# Altium PCB Key.PcbDoc
Units mil, origin at the board's own origin, x right, y up, seen from the top; angles counter-clockwise.
Board outline 1960 x 1940 mil, 2 copper layers (Top Layer, Bottom Layer); 44 components, 36 nets, 185 pads, 103 vias.
Unrouted connection lines stored in the file: 29.
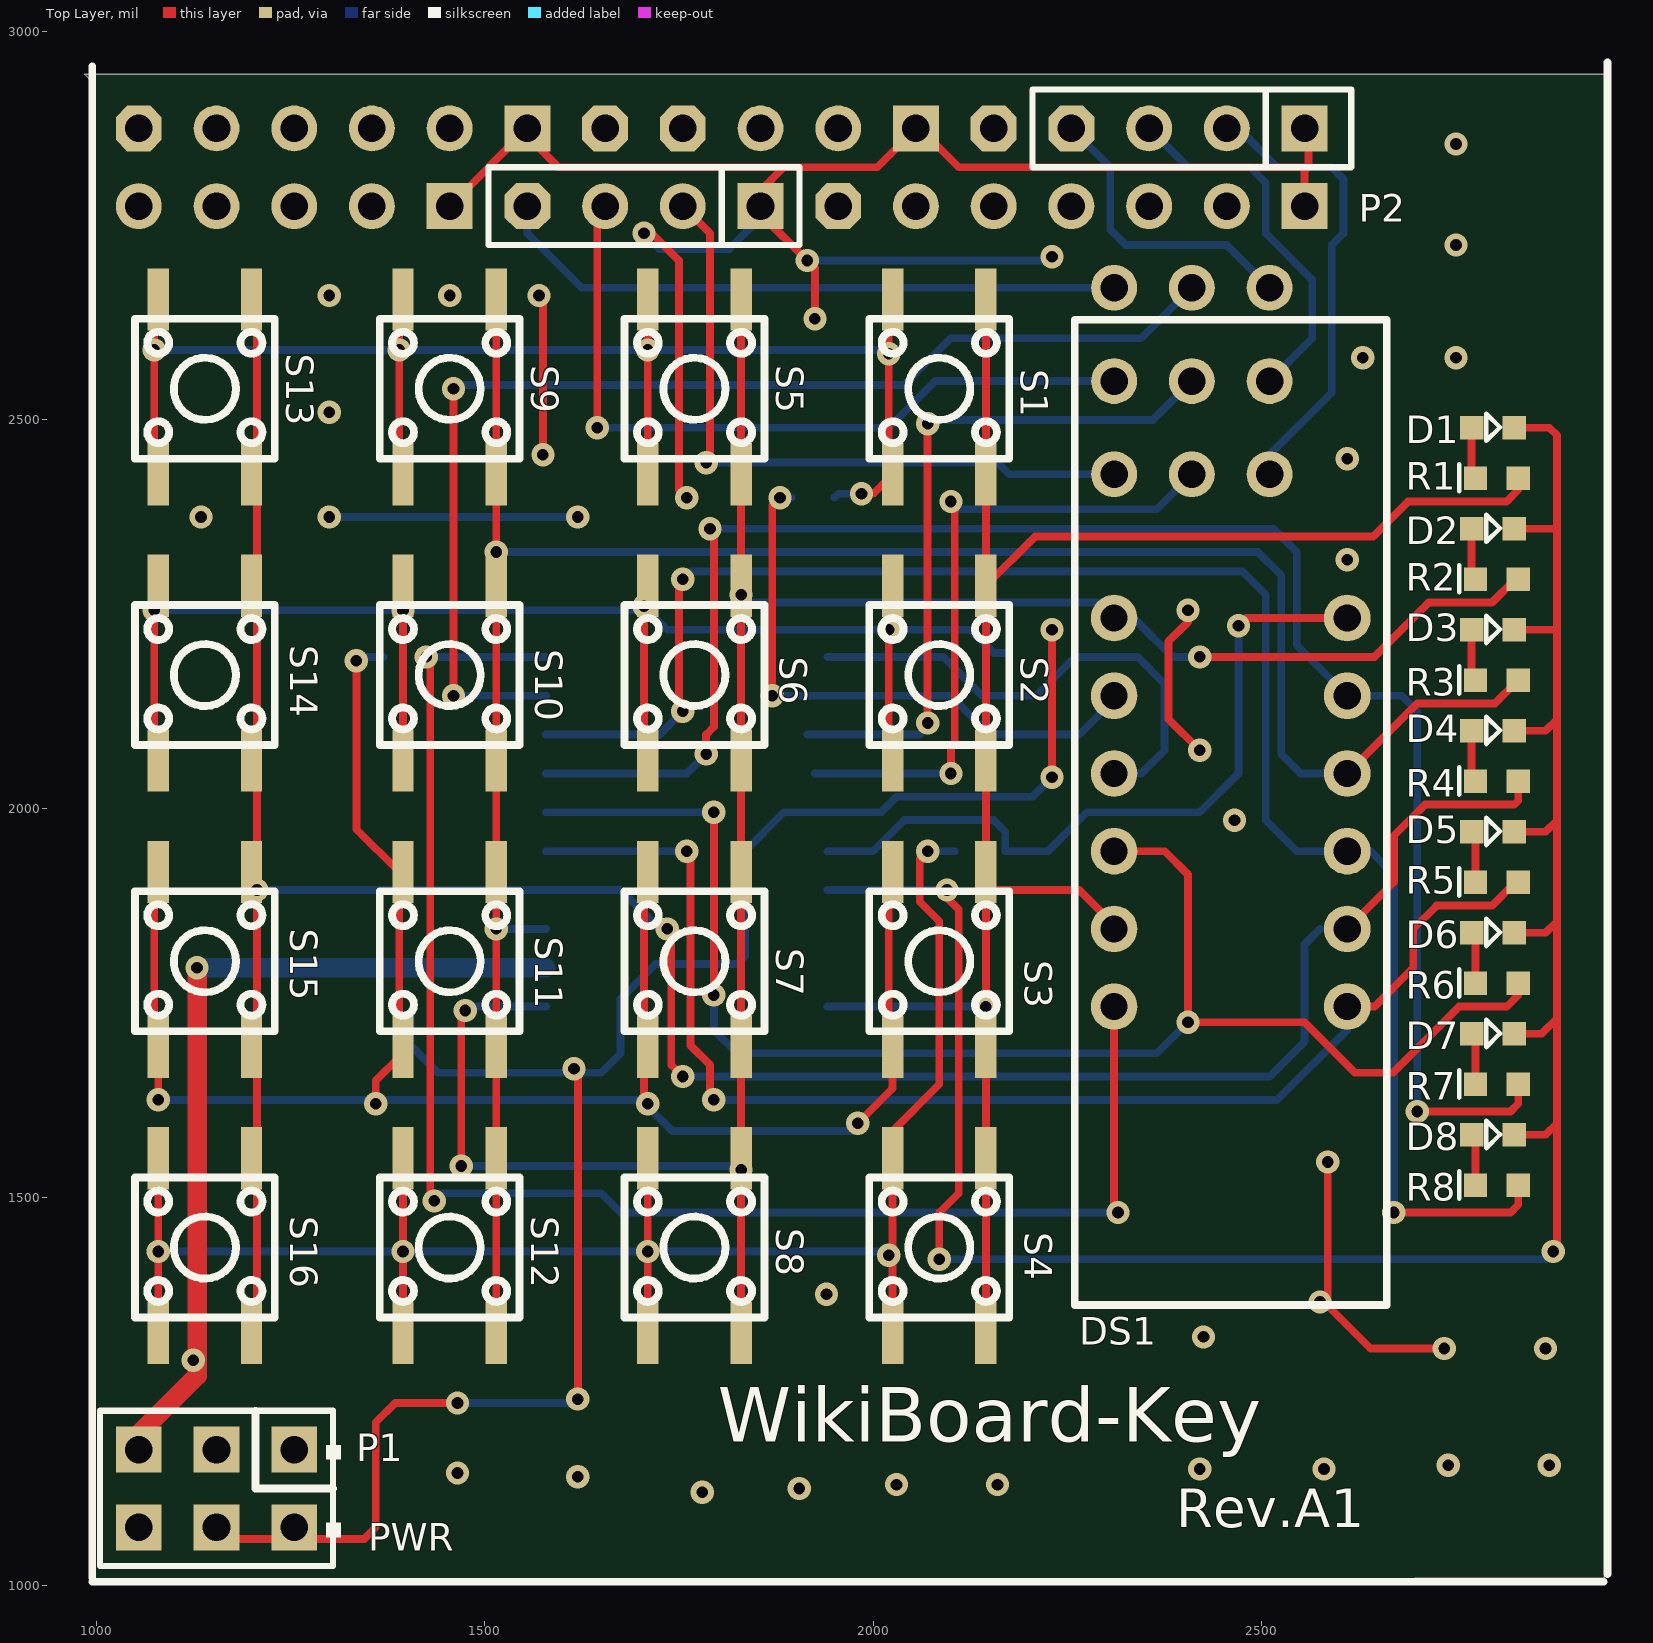
[diagram p0: Top Layer view]
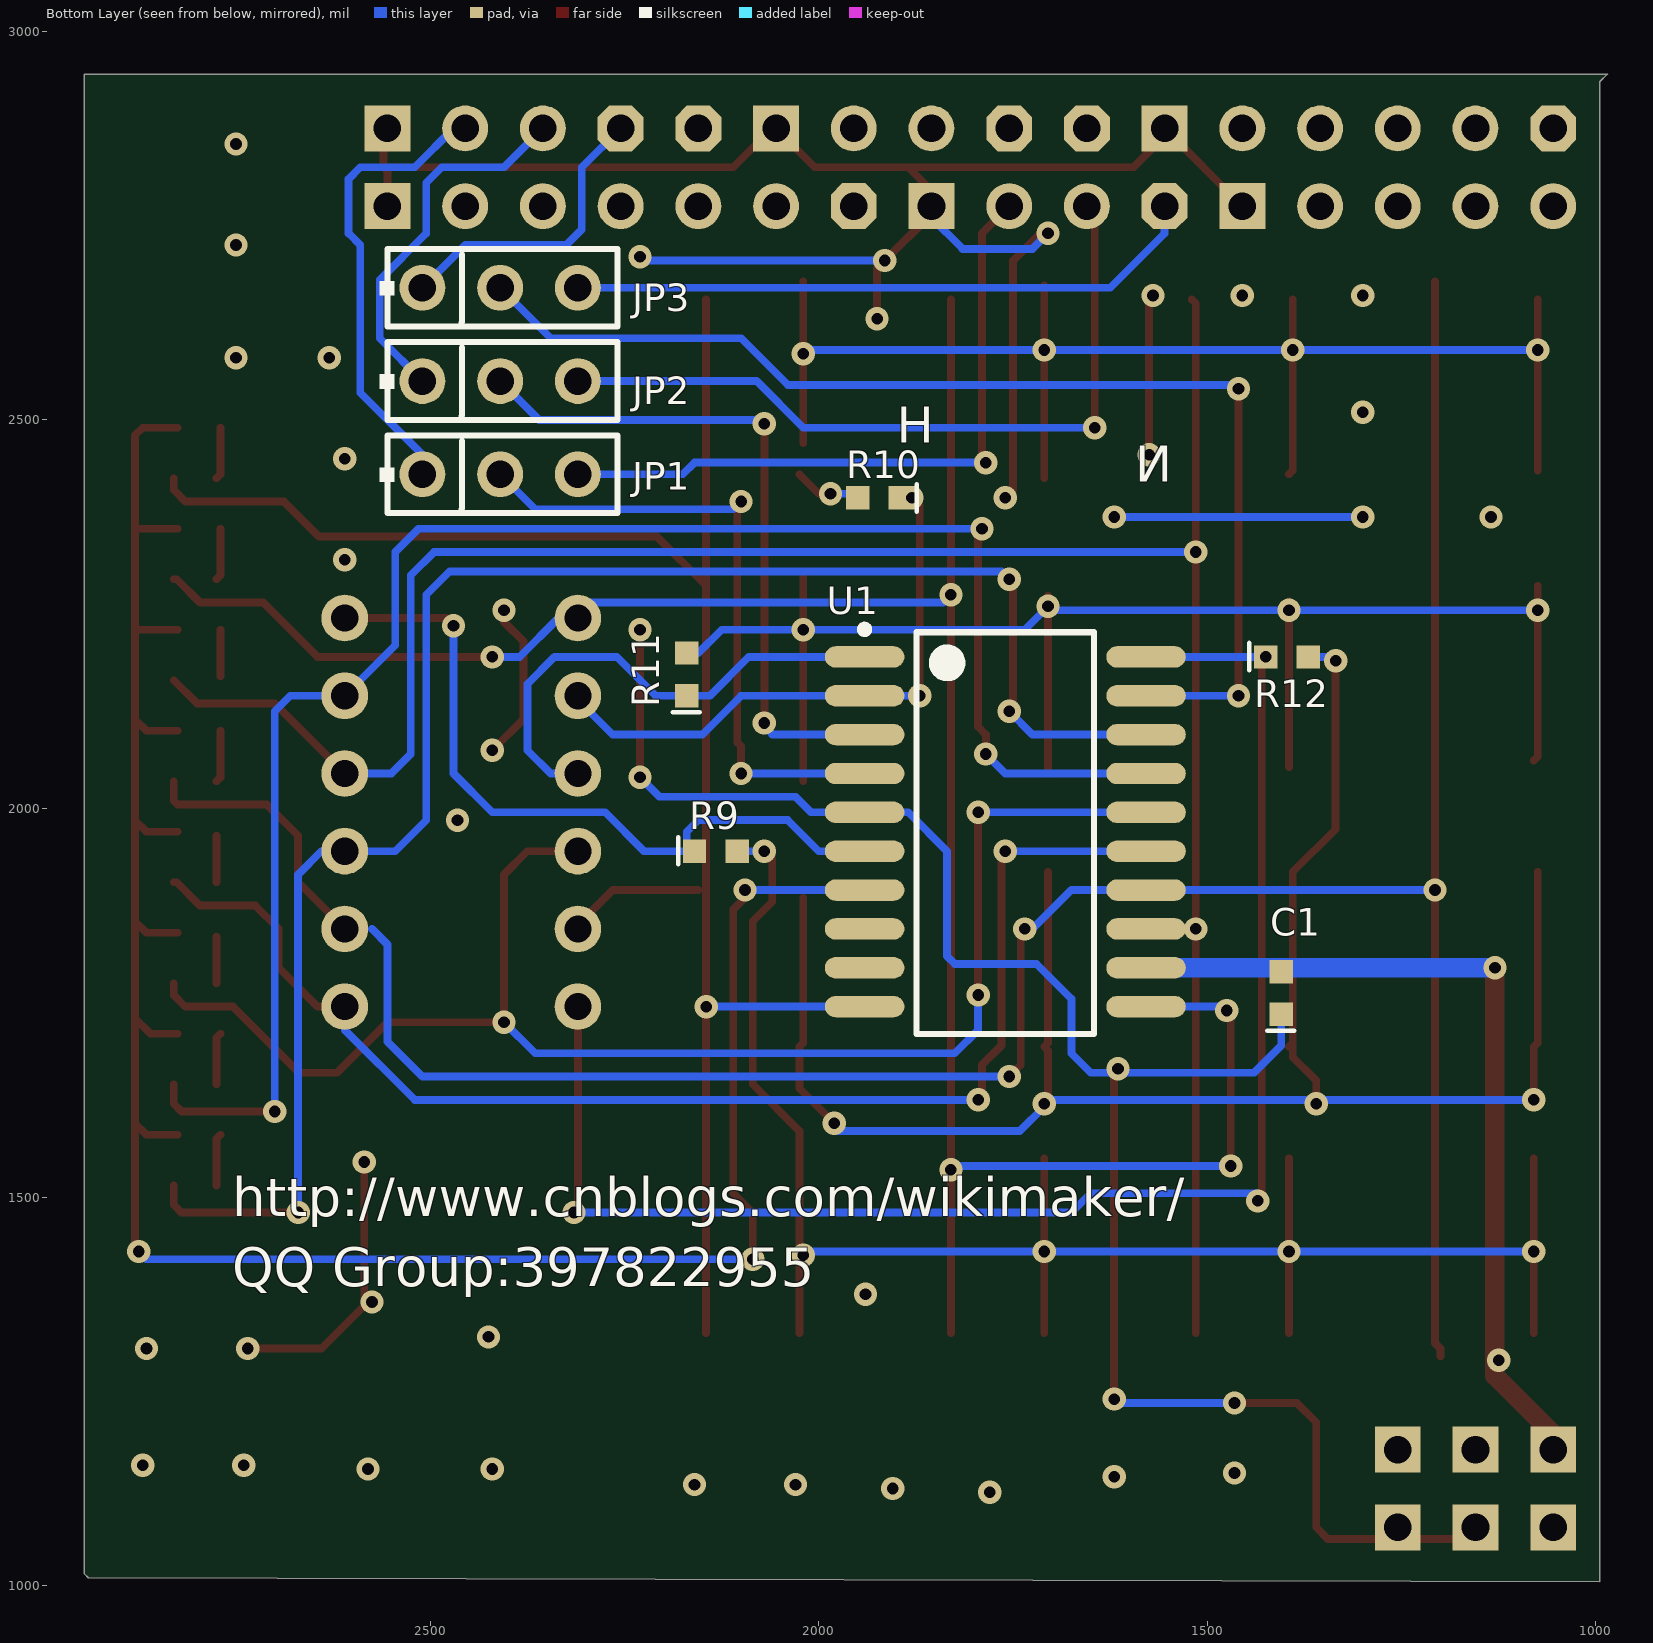
[diagram p1: Bottom Layer view, seen from below]

## Layer stack, top to bottom
Top Solder: solder mask 0.4, Solder Resist, Dk 3.5
Top Layer: signal copper 1.4
Dielectric1: dielectric 12.6, FR-4, Dk 4.8
Bottom Layer: signal copper 1.4
Bottom Solder: solder mask 0.4, Solder Resist, Dk 3.5

## Board outline
2940,1010 2945,1015 2945,2945 985,2945 995,2935 995,1005

## Design rules (kind name [scope] priority, off if disabled: settings)
Clearance [All] p1: gap=10
PolygonConnect [All] p1: connectstyle=Relief reliefconductorwidth=10 reliefentries=4 polygonreliefangle="90 Angle" airgapwidth=10
RoomDefinition Key [InComponentClass('Key')] p1: confinementstyle=ConfineIn formatcopy=TRUE lockcomponents=FALSE outline 995,1000 2945,1000 2945,2945 995,2945
RoutingVias [All] p1: holewidth=15 width=30 viastyle="Through Hole" minholewidth=10 minwidth=20 maxholewidth=28 maxwidth=50
SolderMaskExpansion [All] p1: expansion=4
UnpouredPolygon [All] p1: allowunpoured=FALSE
Width [All] p1: maxlimit=30 minlimit=10 preferedwidth=10
29 further rules are at their usual default settings.

## Components (designator, comment, footprint, x,y, rotation, side; value= is the part's Value field where it differs from the comment)
C1 "0.1uF" 0603M 1405,1735 r90 bottom
D1 "RED" 0603pn 2770,2490 r0 top
D2 "RED" 0603pn 2770,2360 r0 top
D3 "RED" 0603pn 2770,2230 r0 top
D4 "RED" 0603pn 2770,2100 r0 top
D5 "RED" 0603pn 2770,1970 r0 top
D6 "RED" 0603pn 2770,1840 r0 top
D7 "RED" 0603pn 2770,1710 r0 top
D8 "RED" 0603pn 2770,1580 r0 top
DS1 "7SEG-4" 7SGLED-4-0.28 2460,1995 r90 top
JP1 "Jumper3" HDR1X3/2.54MM 2510,2430 r180 bottom
JP2 "Jumper3" HDR1X3/2.54MM 2510,2550 r180 bottom
JP3 "Jumper3" HDR1X3/2.54MM 2510,2670 r180 bottom
P1 "WIKIPWR" WIKIPWR 1255,1175 r180 top
P2 "WIKIPRHL-R" HDR2X16-WIKIPRHL-R 2555,2875 r180 top
R1 "1K" 0603M 2775,2425 r0 top
R2 "1K" 0603M 2775,2295 r0 top
R3 "1K" 0603M 2775,2165 r0 top
R4 "1K" 0603M 2775,2035 r0 top
R5 "1K" 0603M 2775,1905 r0 top
R6 "1K" 0603M 2775,1775 r0 top
R7 "1K" 0603M 2775,1645 r0 top
R8 "1K" 0603M 2775,1515 r0 top
R9 "10K" 0603M 2160,1945 r180 bottom
R10 "10K" 0603M 1895,2400 r0 bottom
R11 "10K" 0603M 2170,2145 r90 bottom
R12 "10K" 0603M 1425,2195 r180 bottom
S1 "SW-PB" KEY-4.5X4.5-SMD 2085,2540 r270 top
S2 "SW-PB" KEY-4.5X4.5-SMD 2085,2171.67 r270 top
S3 "SW-PB" KEY-4.5X4.5-SMD 2085,1803.33 r270 top
S4 "SW-PB" KEY-4.5X4.5-SMD 2085,1435 r270 top
S5 "SW-PB" KEY-4.5X4.5-SMD 1770,2540 r270 top
S6 "SW-PB" KEY-4.5X4.5-SMD 1770,2171.67 r270 top
S7 "SW-PB" KEY-4.5X4.5-SMD 1770,1803.33 r270 top
S8 "SW-PB" KEY-4.5X4.5-SMD 1770,1435 r270 top
S9 "SW-PB" KEY-4.5X4.5-SMD 1455,2540 r270 top
S10 "SW-PB" KEY-4.5X4.5-SMD 1455,2171.67 r270 top
S11 "SW-PB" KEY-4.5X4.5-SMD 1455,1803.33 r270 top
S12 "SW-PB" KEY-4.5X4.5-SMD 1455,1435 r270 top
S13 "SW-PB" KEY-4.5X4.5-SMD 1140,2540 r270 top
S14 "SW-PB" KEY-4.5X4.5-SMD 1140,2171.67 r270 top
S15 "SW-PB" KEY-4.5X4.5-SMD 1140,1803.33 r270 top
S16 "SW-PB" KEY-4.5X4.5-SMD 1140,1435 r270 top
U1 "CH450K/H" SO20W_M 1760,2020 r180 bottom

## Footprints (in the part's own frame and the unit in brackets; to place one, negate y for a bottom-side part, rotate by r counter-clockwise, add the part's x,y. Pads: shape width x height; smd on the part's side, far side on the other; paste and mask are expansions set on the pad)
7SGLED-4-0.28 [mil]
  round 60 hole 35: 1(-250,-150) 2(-150,-150) 3(-50,-150) 4(50,-150) 5(150,-150) 6(250,-150) 7(250,150) 8(150,150) 9(50,150) 10(-50,150) 11(-150,150) 12(-250,150)
  silkscreen extent -634,-201 634,201
0603M [mil]
  rect 30x30 smd: 1(0,0) 2(55,0)
  silkscreen extent -21,-17 -21,18, body extent -5,-15 60,15, height 43
0603pn [mil]
  rect 30x30 smd: 1(0,0) 2(55,0)
  silkscreen extent 19,-17 36,18
HDR1X3/2.54MM [mm]
  round 1.5 hole 0.9: 1(0,0) 2(2.54,0) 3(5.08,0)
  silkscreen extent -1.4,-1.27 6.38,1.27
HDR2X16-WIKIPRHL-R [mm] "Connector; Header; 16x2 Position"
  rect 1.5x1.5 hole 0.9: 1(0,0) 2(0,2.54) 11(12.7,0) 16(17.78,2.54) 21(25.4,0) 24(27.94,2.54)
  round 1.5 hole 0.9: 3(2.54,0) 4(2.54,2.54) 5(5.08,0) 6(5.08,2.54) 8(7.62,2.54) 10(10.16,2.54) 12(12.7,2.54) 13(15.24,0) 15(17.78,0) 18(20.32,2.54) 20(22.86,2.54) 23(27.94,0) 25(30.48,0) 26(30.48,2.54) 27(33.02,0) 28(33.02,2.54) 29(35.56,0) 30(35.56,2.54) 32(38.1,2.54)
  oct 1.5x1.5 hole 0.9: 7(7.62,0) 9(10.16,0) 14(15.24,2.54) 17(20.32,0) 19(22.86,0) 22(25.4,2.54) 31(38.1,0)
KEY-4.5X4.5-SMD [mil]
  rect 80x27.56 smd: 1(-115,-60) 1(110,-60) 2(-115,60) 2(110,60)
  silkscreen extent -90,-90 90,90
SO20W_M [mm] "16-Pin Small Outline Integrated Circuit 1.27 mm Pitch, IPC Low Density"
  oval 2.6x0.7 smd: 1(-4.6,4.445) 2(-4.6,3.175) 3(-4.6,1.905) 4(-4.6,0.635) 5(-4.6,-0.635) 6(-4.6,-1.905) 7(-4.6,-3.175) 8(-4.6,-4.445) 9(-4.6,-5.715) 10(-4.6,-6.985) 11(4.6,-6.985) 12(4.6,-5.715) 13(4.6,-4.445) 14(4.6,-3.175) 15(4.6,-1.905) 16(4.6,-0.635) 17(4.6,0.635) 18(4.6,1.905) 19(4.6,3.175) 20(4.6,4.445)
  silkscreen extent -4.72,-7.87 2.9,5.47, body extent -3.75,-7.87 3.81,5.25, height 2.65
WIKIPWR [mm] "Connector; Header; 3x2 Position"
  rect 1.5x1.5 hole 0.9: 1(0,0) 2(0,2.54) 3(2.54,0) 4(2.54,2.54) 5(5.08,0) 6(5.08,2.54)
  silkscreen extent -1.52,-1.27 6.35,3.81

## Part data
C1: library part Cap, "Capacitor"
D1 D2 D3 D4 D5 D6 D7 D8: library part LED0, "Typical INFRARED GaAs LED"
DS1: "Black Surface HER 7-Segment Display"
P1: "PWR HDR"
P2: "Header, 16-Pin, Dual row"
R1 R2 R3 R4 R5 R6 R7 R8 R9 R10 R11 R12: library part Res2, "Resistor"
S1 S2 S3 S4 S5 S6 S7 S8 S9 S10 S11 S12 S13 S14 S15 S16: "Switch"
U1: "7 Segment LED& Key"

## Via types
v1: diameter 30, hole 15, Top Layer to Bottom Layer, 103 vias

## Nets (pads, with @x,y where several pads share a name; then routed paths per layer and width w, separated by ;. In a path a pad name is that pad's centre, name@x,y a point inside that pad or via, vN(x,y) a via of type N, cw(c..) or ccw(c..) an arc to the next point about the centre after c; other vN are vias at no path point)
CHDIG2: DS1.12 R12.1 U1.20 | length 2028.4
  Top Layer w10: v1(1425,2195) 1430,2195 1430,1500 v1(1435,1495) ; DS1.12 2310,1485 v1(2315,1480)
  Bottom Layer w10: v1(1425,2195) U1.20 ; v1(1435,1495) 1435,1505 1650,1505 1675,1480 v1(2315,1480)
CHDIG3: DS1.9 R11.1 U1.1 | length 652.2
  Bottom Layer w10: U1.1 2090,2195 2140,2145 R11.1 2210,2145 2260,2195 2340,2195 2375,2160 2375,2075 2345,2045 DS1.9
CHDIG4: DS1.8 R10.1 U1.2 | length 758.5
  Top Layer w10: v1(1870,2145) 1870,2390 v1(1880,2400)
  Bottom Layer w10: v1(1870,2145) U1.2 2100,2145 2150,2095 2265,2095 2310,2140 DS1.8 ; v1(1880,2400) R10.1
CHDIG5: DS1.6 R9.1 U1.6 | length 952.2
  Top Layer w10: v1(2470,2235) 2480,2245 DS1.6
  Bottom Layer w10: U1.6 2000,1945 2040,1985 2155,1985 2170,1970 2170,1945 2225,1945 2275,1995 2420,1995 2470,2045 v1(2470,2235)
CHDIG6: D1.2 D2.2 D3.2 D4.2 D5.2 D6.2 D7.2 D8.2 U1.7 | length 2988.1
  Top Layer w10: v1(2085,1420) 2085,1480 2110,1505 2110,1870 2085,1895 v1(2095,1895) ; D8.2 2865,1580 2880,1595 ; D7.2 2860,1710 2880,1730 ; D6.2 2865,1840 2880,1855 ; D5.2 2865,1970 2880,1985 ; D4.2 2865,2100 2880,2115 ; D3.2 2880,2230 ; D2.2 2880,2360 2880,2355 ; D1.2 2870,2490 2880,2480 2880,2230 ; v1(2875,1430) 2880,1435 2880,1595 ; 2880,1595 2880,1730 ; 2880,1730 2880,1855 ; 2880,1855 2880,1985 ; 2880,1985 2880,2115 ; 2880,2115 2880,2230
  Bottom Layer w10: U1.7 v1(2095,1895) ; v1(2085,1420) 2865,1420 v1(2875,1430)
CHINT: JP3.2 U1.19 | length 1517.7
  Top Layer w10: v1(1460,2145) v1(1460,2540)
  Bottom Layer w10: v1(1460,2145) U1.19 ; v1(1460,2540) 1465,2545 2040,2545 2100,2605 2345,2605 JP3.2
CHINT1: JP3.1 P2.7 | length 386.8
  Bottom Layer w10: P2.7 2305,2825 2305,2745 2325,2725 2455,2725 JP3.1
CHINT2: JP3.3 P2.22 | length 819
  Bottom Layer w10: P2.22 1555,2740 1625,2670 JP3.3
CHSCL: JP2.2 U1.3 | length 919.9
  Top Layer w10: v1(2070,2110) v1(2070,2495)
  Bottom Layer w10: U1.3@1915,2095 U1.3 2060,2095 v1(2070,2110) ; v1(2070,2495) v1@2080,2500 ; v1@2070,2500 v1@2080,2500 ; JP2.2 2360,2500 v1@2080,2500
CHSCL1: JP2.1 P2.5 | length 481.6
  Bottom Layer w10: P2.5 2405,2825 2485,2825 2505,2805 2505,2740 2565,2680 2565,2605 JP2.1
CHSCL2: JP2.3 P2.20 | length 979
  Top Layer w10: v1(1645,2490) 1645,2765 P2.20
  Bottom Layer w10: v1(1645,2490) 2020,2490 2080,2550 JP2.3
CHSDA: JP1.2 U1.4 | length 861.9
  Top Layer w10: v1(2100,2045) 2100,2080 2105,2085 2105,2390 v1(2100,2395)
  Bottom Layer w10: U1.4@1925,2045 U1.4 v1(2100,2045) ; v1(2100,2395) 2110,2385 2365,2385 JP1.2
CHSDA1: JP1.1 P2.3 | length 581.3
  Bottom Layer w10: P2.3@2470,2875 2520,2825 2590,2825 2605,2810 2605,2740 2590,2725 2590,2535 2510,2455 JP1.1
CHSDA2: JP1.3 P2.18 | length 891.9
  Top Layer w10: P2.18 1790,2740 1790,2440 v1(1785,2445)
  Bottom Layer w10: v1(1785,2445) 1790,2440 1795,2445 2160,2445 2175,2430 JP1.3
CHSEG0: DS1.11 R1.2 S1.2 S2.2 S3.2 S4.2 U1.10 | length 2465.7
  Top Layer w10: S4.2@2145,1325 2145,1550 2145,1693.33 2145,1918.33 2145,2061.67 S2.2@2145,2286.67 ; S1.2@2145,2655 2145,2430 S2.2@2145,2286.67 ; S3.2@2155,1895 2265,1895 DS1.11@2315,1845 ; R1.2 2830,2410 2815,2395 2688.28,2395 2643.28,2350 2208.33,2350 S2.2@2145,2286.67
  Bottom Layer w10: U1.10 v1(2145,1745)
CHSEG1: DS1.7 R2.2 S5.2 S6.2 S7.2 S8.2 U1.11 | length 3077.6
  Top Layer w10: v1(1470,1540) 1470,1735 v1(1475,1740) ; S8.2@1830,1325 v1(1830,1535) 1830,1550 1830,1693.33 1830,1918.33 1830,2061.67 1830,2286.67 1830,2430 S5.2@1830,2655 ; v1(2420,2195) 2645,2195 2715,2265 2753.79,2265 2796.21,2265 2826.21,2295 R2.2
  Bottom Layer w10: v1(1470,1540) v1@1830,1540 ; v1(1475,1740) 1480,1745 U1.11 ; v1(1830,2275) 1840,2265 2295,2265 DS1.7@2315,2245 ; DS1.7 DS1.7@2315,2245 ; v1(2420,2195) 2385,2195 2335,2245 DS1.7@2315,2245
CHSEG2: DS1.4 R3.2 S9.2 S10.2 S11.2 S12.2 U1.13 | length 3013.5
  Top Layer w10: S12.2@1515,1325 1515,2650 S9.2@1520,2655 ; DS1.4 2700,2135 2800,2135 R3.2
  Bottom Layer w10: v1(1515,1845) U1.13 ; v1(1515,2330) 2495,2330 2525,2300 2525,2070 2550,2045 DS1.4
CHSEG3: DS1.2 R4.2 S13.2 S14.2 S15.2 S16.2 U1.14 | length 3453.2
  Top Layer w10: S16.2@1200,1295 1200,1305 1207.17,1312.17 v1(1207.17,1895) 1207.17,2430 S13.2@1207.17,2678.03 ; v1(1735,1845) 1740,1840 1740,1670 v1(1755,1655) ; DS1.2 2670,1905 2670,1965 2710,2005 2825,2005 2830,2010 R4.2
  Bottom Layer w10: v1(1207.17,1895) U1.14 1675,1895 1725,1845 v1(1735,1845) ; v1(1755,1655) 2510,1655 2555,1700 2555,1825 2575,1845
CHSEG4: DS1.1 R5.2 U1.15 | length 1716.4
  Top Layer w10: v1(1760,1945) 1765,1940 1765,1695 1790,1670 v1@1790,1620 ; DS1.1 2645,1745 2695,1795 2695,1845 2725,1875 2796.21,1875 2826.21,1905 R5.2
  Bottom Layer w10: U1.15 v1(1760,1945) ; v1(1795,1625) 2520,1625 2610,1715 DS1.1
CHSEG5: DS1.10 R6.2 U1.16 | length 1940.9
  Top Layer w10: v1(1795,1760) v1(1795,1995) ; DS1.10 2375,1945 2405,1915 v1(2405,1725) 2492.43,1725 2555,1725 2620,1660 2668.79,1660 2753.79,1745 2815,1745 2830,1760 R6.2
  Bottom Layer w10: U1.16 v1(1795,1995) ; v1(1795,1760) 1795,1715 1825,1685 2365,1685 v1(2405,1725)
CHSEG6: DS1.5 R7.2 U1.17 | length 2264.4
  Top Layer w10: v1(1785,2070) 1785,2095 1795,2105 1795,2355 v1(1790,2360) ; v1(2700,1610) 2820,1610 2830,1620 R7.2
  Bottom Layer w10: U1.17 1760,2045 v1(1785,2070) ; v1(1790,2360) 2515,2360 2545,2330 2545,2210 DS1.5 2680,2145 2700,2125 v1(2700,1610)
CHSEG7: DS1.3 R8.2 U1.18 | length 2264.4
  Top Layer w10: v1(1755,2125) 1760,2125 1750,2115 1750,2290 v1(1755,2295) ; v1(2670,1480) 2820,1480 2830,1490 R8.2
  Bottom Layer w10: U1.18 1725,2095 v1(1755,2125) ; v1(1755,2295) 1765,2305 2475,2305 2505,2275 2505,1985 2545,1945 DS1.3 2640,1945 2670,1915 v1(2670,1480)
GND: C1.1 P1.2 P1.4 P2.1 P2.2 P2.11 P2.16 P2.21 P2.24 U1.5 | length 5875.9
  Top Layer w10: P1.4@1160,1060 1345,1060 1360,1075 1360,1210 1385,1235 v1(1465,1235) ; P2.24 P2.21 ; P2.21@1555,2865 1595,2825 1885,2825 ; v1(1570,2660) 1575,2655 v1(1575,2455) ; v1(1615,1665) 1620,1660 v1@1620,1250 ; v1(1705,2740) 1715,2740 1750,2705 1750,2410 v1(1760,2400) ; v1(1925,2630) 1925,2695 v1(1915,2705) 1855,2765 P2.16 1855,2795 1885,2825 ; P2.11 2005,2825 1885,2825 ; P2.11@2060,2875 2110,2825 2560,2825 ; v1(2230,2040) v1(2230,2230) ; v1(2405,2255) 2405,2240 2380,2215 2380,2115 v1(2420,2075) ; P2.2 2555,2820 2560,2825 ; P2.1@2560,2870 2560,2825 ; v1(2585,1545) 2585,1360 2640,1305 v1(2735,1305)
  Bottom Layer w10: v1(1300,2375) v1(1620,2375) ; C1.1 1405,1695 1440,1660 1650,1660 1675,1685 1675,1755 1720,1800 1825,1800 1835,1810 1835,1945 1885,1995 U1.5 2010,1995 2030,2015 2205,2015 v1(2230,2040) ; v1(1465,1235) v1@1620,1235 ; v1(1705,2740) 1725,2720 1815,2720 1855,2760 P2.16 ; v1(1915,2705) 2225,2705 v1(2230,2710)
  other v1: 1780,1120 1905,1125 2030,1130 2160,1130 1620,1140 1465,1145 2420,1150 2580,1150 2740,1155 2870,1155 1620,1240 2865,1305 2425,1320 2575,1365 1940,1375 2465,1985 2610,2320 1135,2375 2610,2450 1300,2510 2630,2580 2750,2580 1300,2660 1455,2660 2750,2725 2750,2855
NetD1_1: D1.1 R1.1 | length 67.1
  Top Layer w10: D1.1 2770,2430 R1.1
NetD2_1: D2.1 R2.1 | length 67.1
  Top Layer w10: D2.1 2770,2300 R2.1
NetD3_1: D3.1 R3.1 | length 60
  Top Layer w10: R3.1@2770,2170 D3.1
NetD4_1: D4.1 R4.1 | length 67.1
  Top Layer w10: D4.1 2770,2040 R4.1
NetD5_1: D5.1 R5.1 | length 60
  Top Layer w10: R5.1 D5.1@2775,1965
NetD6_1: D6.1 R6.1 | length 60
  Top Layer w10: R6.1 D6.1@2775,1835
NetD7_1: D7.1 R7.1 | length 67.1
  Top Layer w10: D7.1 2775,1705 R7.1
NetD8_1: D8.1 R8.1 | length 67.1
  Top Layer w10: D8.1 2775,1575 R8.1
NetR9_2: R9.2 S4.1 S8.1 S12.1 S16.1 | length 2315.6
  Top Layer w10: S16.1@1080,1325 v1(1080,1430) S16.1@1080,1550 ; S12.1@1395,1325 S12.1@1395,1550 ; S8.1@1710,1325 v1(1710,1430) S8.1@1710,1550 ; S4.1@2025,1325 2025,1420 v1(2020,1425) 2025,1430 2025,1550 2025,1585 2085,1645 2085,1855 2060,1880 2060,1935 v1(2070,1945)
  Bottom Layer w10: v1(1080,1430) v1(1710,1430) 2015,1430 v1(2020,1425) ; v1(2070,1945) R9.2
  other v1: 1395,1430
NetR10_2: R10.2 S1.1 S5.1 S9.1 S13.1 | length 1937.6
  Top Layer w10: S13.1@1075,2435 v1(1075,2590) S13.1@1075,2655 ; S9.1@1390,2655 v1(1390,2590) 1390,2435 S9.1@1395,2430 ; S5.1@1710,2425 S5.1@1710,2673.03 ; v1(1985,2405) 2000,2405 S1.1@2025,2430 ; 2020,2470 v1(2020,2585) S1.1@2020,2678.03
  Bottom Layer w10: v1(1075,2590) v1(1390,2590) v1(1710,2590) 2015,2590 v1(2020,2585) ; R10.2 1955,2405 v1(1985,2405)
NetR11_2: R11.2 S2.1 S6.1 S10.1 S14.1 | length 2060
  Top Layer w10: S14.1@1075,2286.67 1075,2066.67 S14.1@1080,2061.67 ; S10.1@1395,2053.33 S10.1@1395,2266.36 ; S6.1@1705,2045 v1(1705,2260) S6.1@1705,2273.64 ; S2.1@2020,2035 S2.1@2020,2301.36
  Bottom Layer w10: v1(1075,2255) v1(1395,2255) v1@1710,2255 ; v1(1705,2260) v1@1710,2255 ; R11.2 2155,2200 2125,2230 v1(2020,2230) 1735,2230 v1@1710,2255
NetR12_2: R12.2 S3.1 S7.1 S11.1 S15.1 | length 2488.9
  Top Layer w10: S15.1@1075,1918.33 1075,1698.33 1080,1693.33 v1(1080,1625) ; v1(1335,2190) 1335,1973.33 1390,1918.33 S11.1@1390,1698.33 ; v1(1360,1620) 1360,1650 1390,1680 S11.1@1390,1698.33 ; S11.1@1395,1693.33 S11.1@1390,1698.33 ; S7.1@1705,1918.33 1705,1698.33 1710,1693.33 1705,1688.33 1705,1625 v1(1710,1620) ; v1(1980,1595) 2025,1640 2025,1693.33 2020,1698.33 S3.1@2020,1884.7
  Bottom Layer w10: v1(1080,1625) 1705,1625 v1(1710,1620) ; v1(1335,2190) 1340,2195 R12.2 ; v1@1710,1616.29 1741.29,1585 1975,1585 1985,1595 v1(1980,1595)
PVDD: C1.2 P1.5 U1.12 | length 1100
  Top Layer w25: P1.5 1055,1195 1130,1270 v1(1130,1795)
  Bottom Layer w25: v1(1130,1795) U1.12
  other v1: 1125,1290
pads on no net: P1.1 P1.3 P1.6 P2.4 P2.6 P2.8 P2.9 P2.10 P2.12 P2.13 P2.14 P2.15 P2.17 P2.19 P2.23 P2.25 P2.26 P2.27 P2.28 P2.29 P2.30 P2.31 P2.32 U1.8 U1.9

## Silkscreen, mask and mechanical layers (free items; w line width, h text height)
Top Overlay:
  lines w8: 1805,2725 1805,2825 ; 2505,2830 2505,2925 ; 1505,2725 1905,2725 1905,2825 1505,2825 1505,2725 ; 2205,2825 2205,2925 2615,2925 2615,2825 2205,2825
  lines w10: 995,1005 2940,1005 ; 995,1010 995,2955 ; 2945,1015 2945,2960
  text "WikiBoard-Key" at 1800,1185 h70
  text "Rev.A1" at 2390,1075 h50
  text "PWR" at 1350,1045 h35
Bottom Overlay:
  text "H" at 1900,2455 h80
  text "N" at 1545,2405 h80
  text "http://www.cnblogs.com/wikimaker/" at 2755,1475 h50
  text "QQ Group:397822955" at 2755,1385 h50